# Altium PCB PCIe_x1_LP_template.PcbDoc
Units mm, origin at the board's own origin, x right, y up, seen from the top; angles counter-clockwise.
Board outline 92.5 x 68.9 mm, 6 copper layers (SIG1, GND1, PWR1, SIG2, GND2, SIG3), stack 1.546 mm thick; 11 components, 310 nets, 86 pads, 0 vias.
Unrouted connection lines stored in the file: 22.
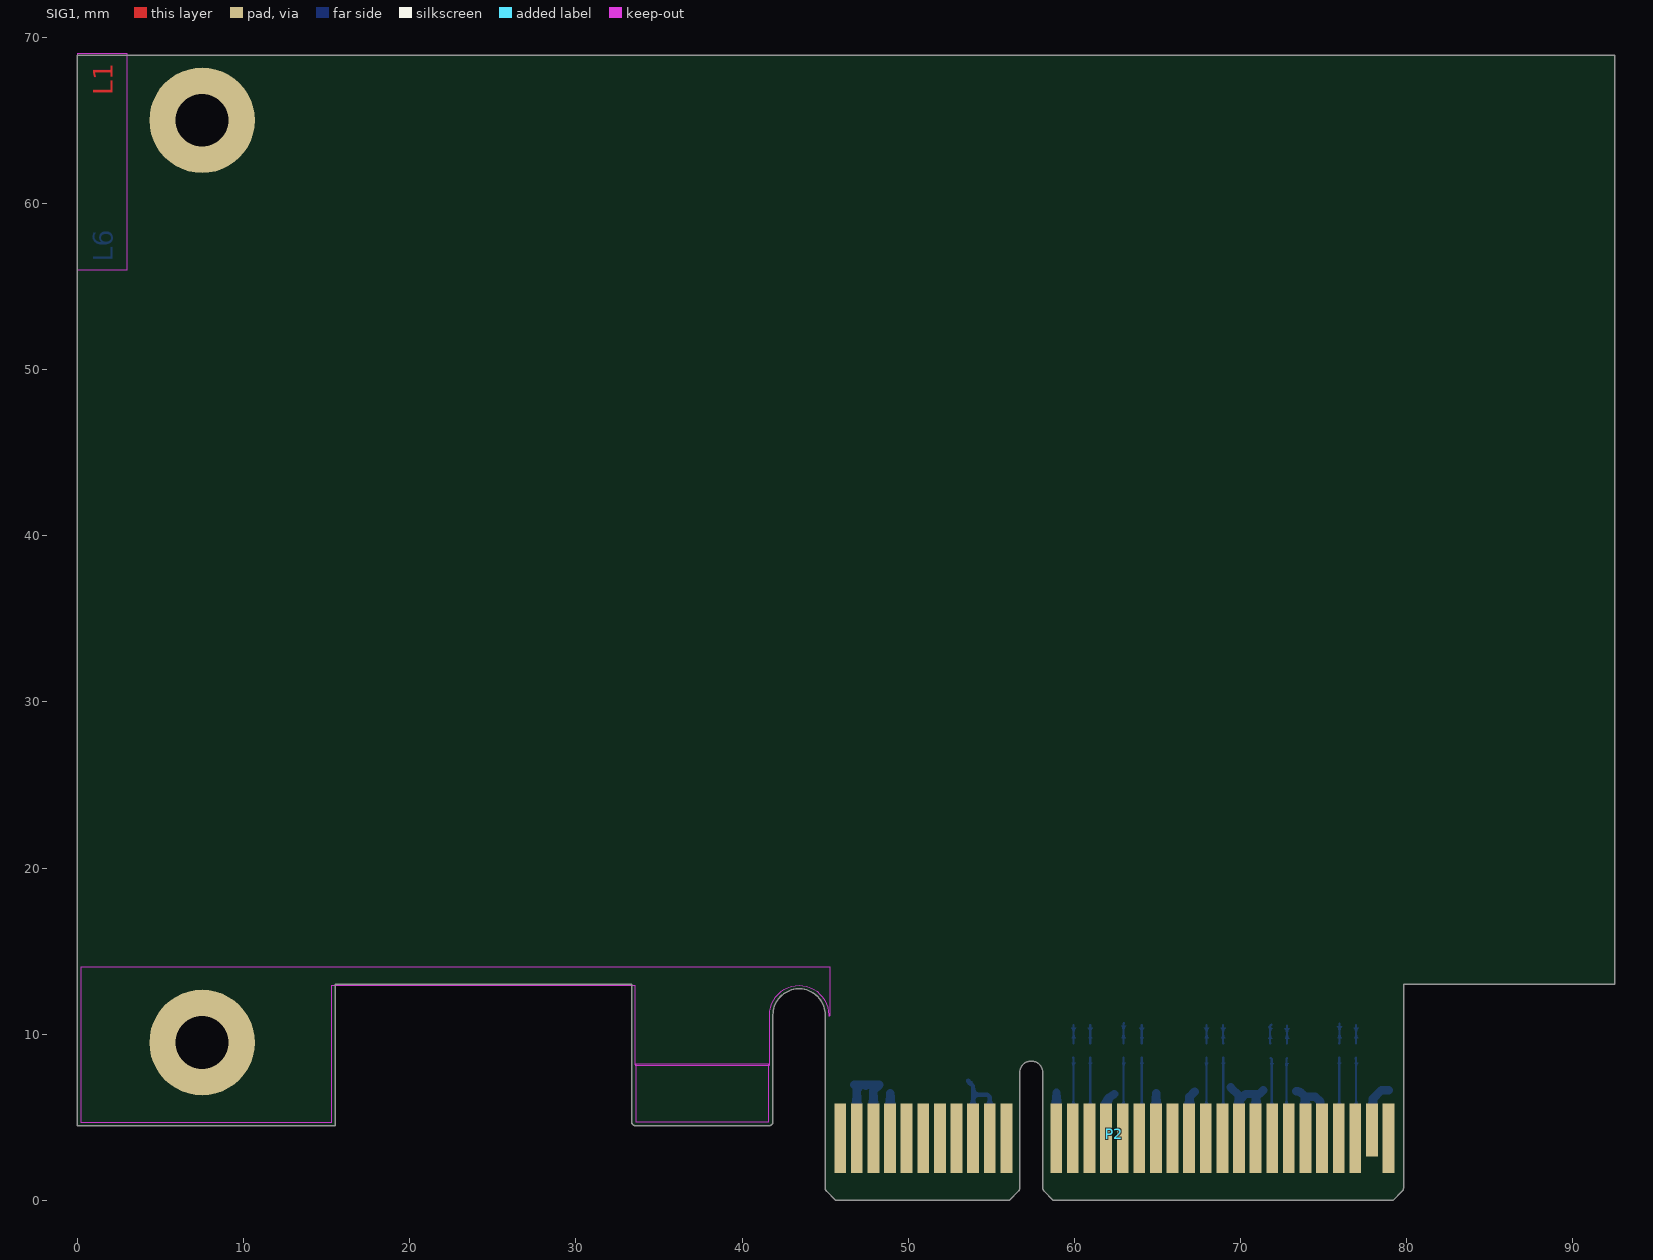
[diagram p0: SIG1 view]
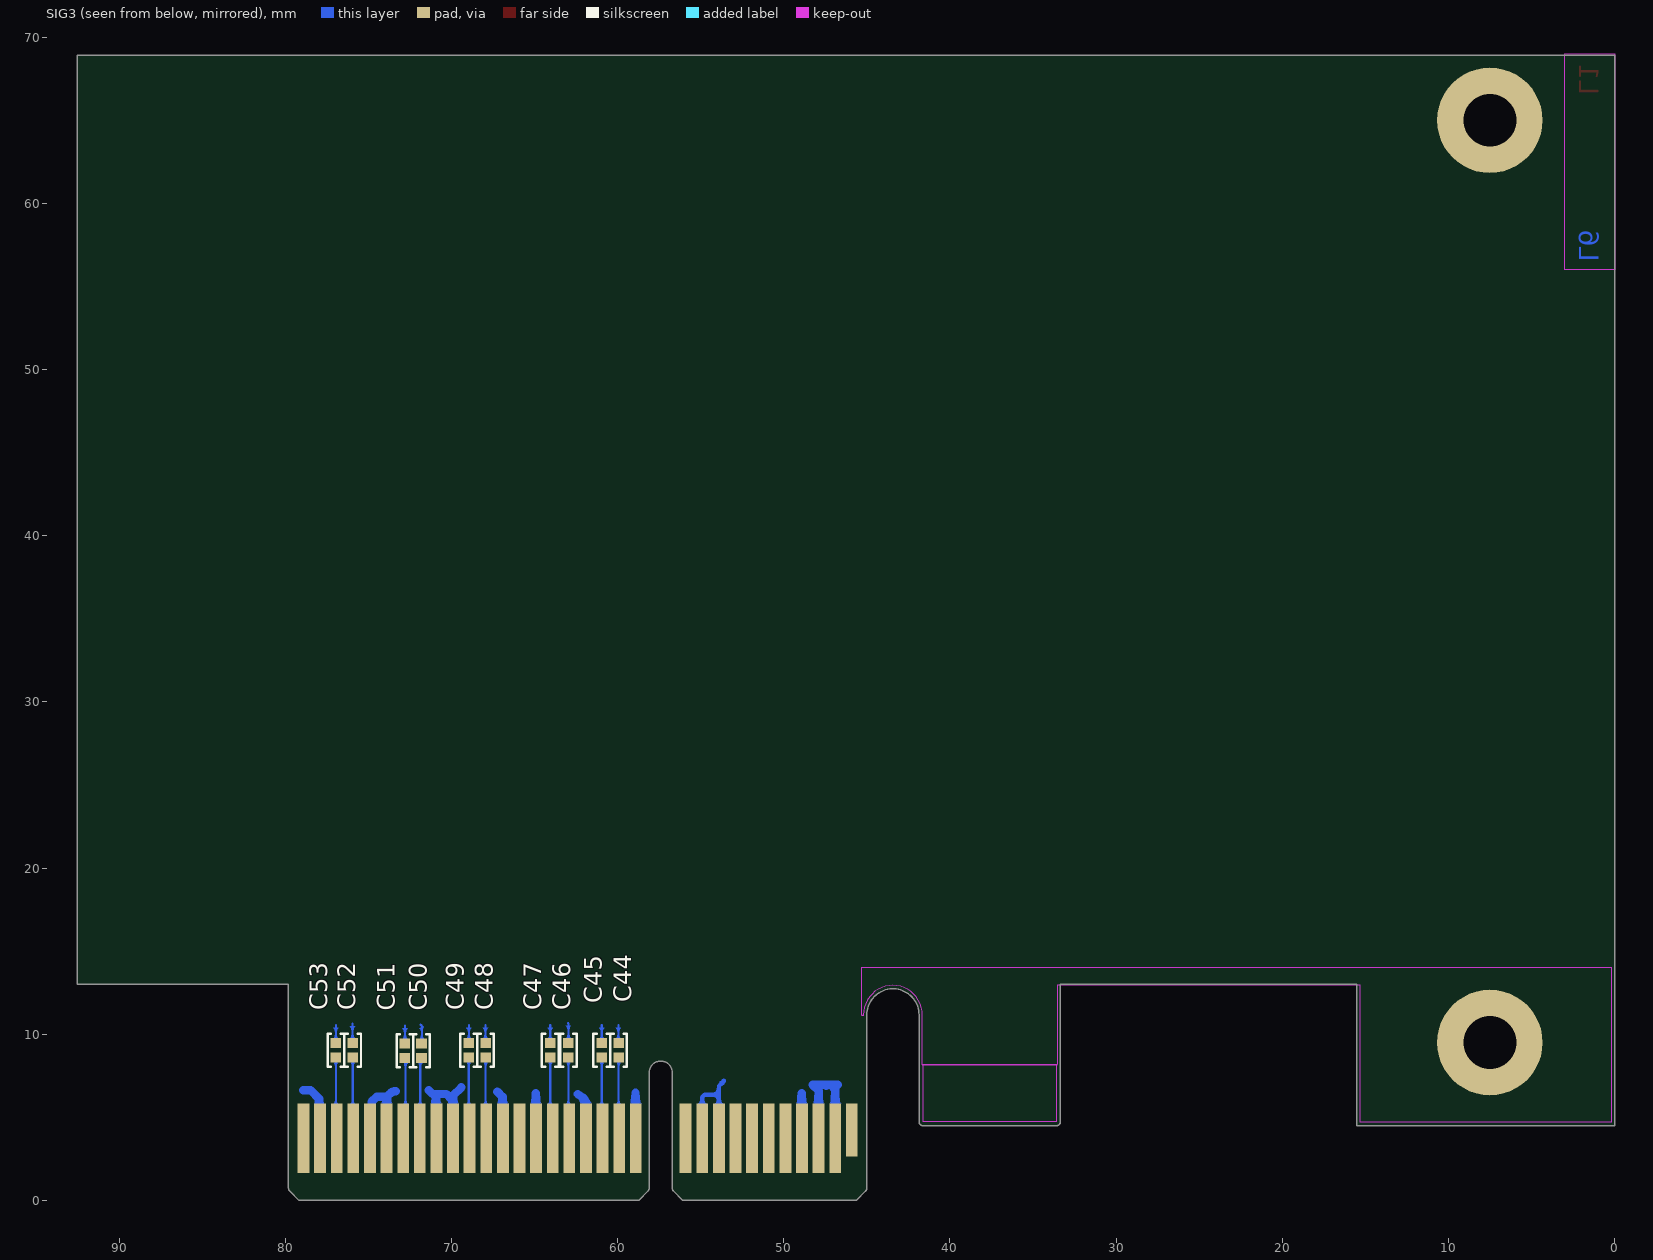
[diagram p1: SIG3 view, seen from below]
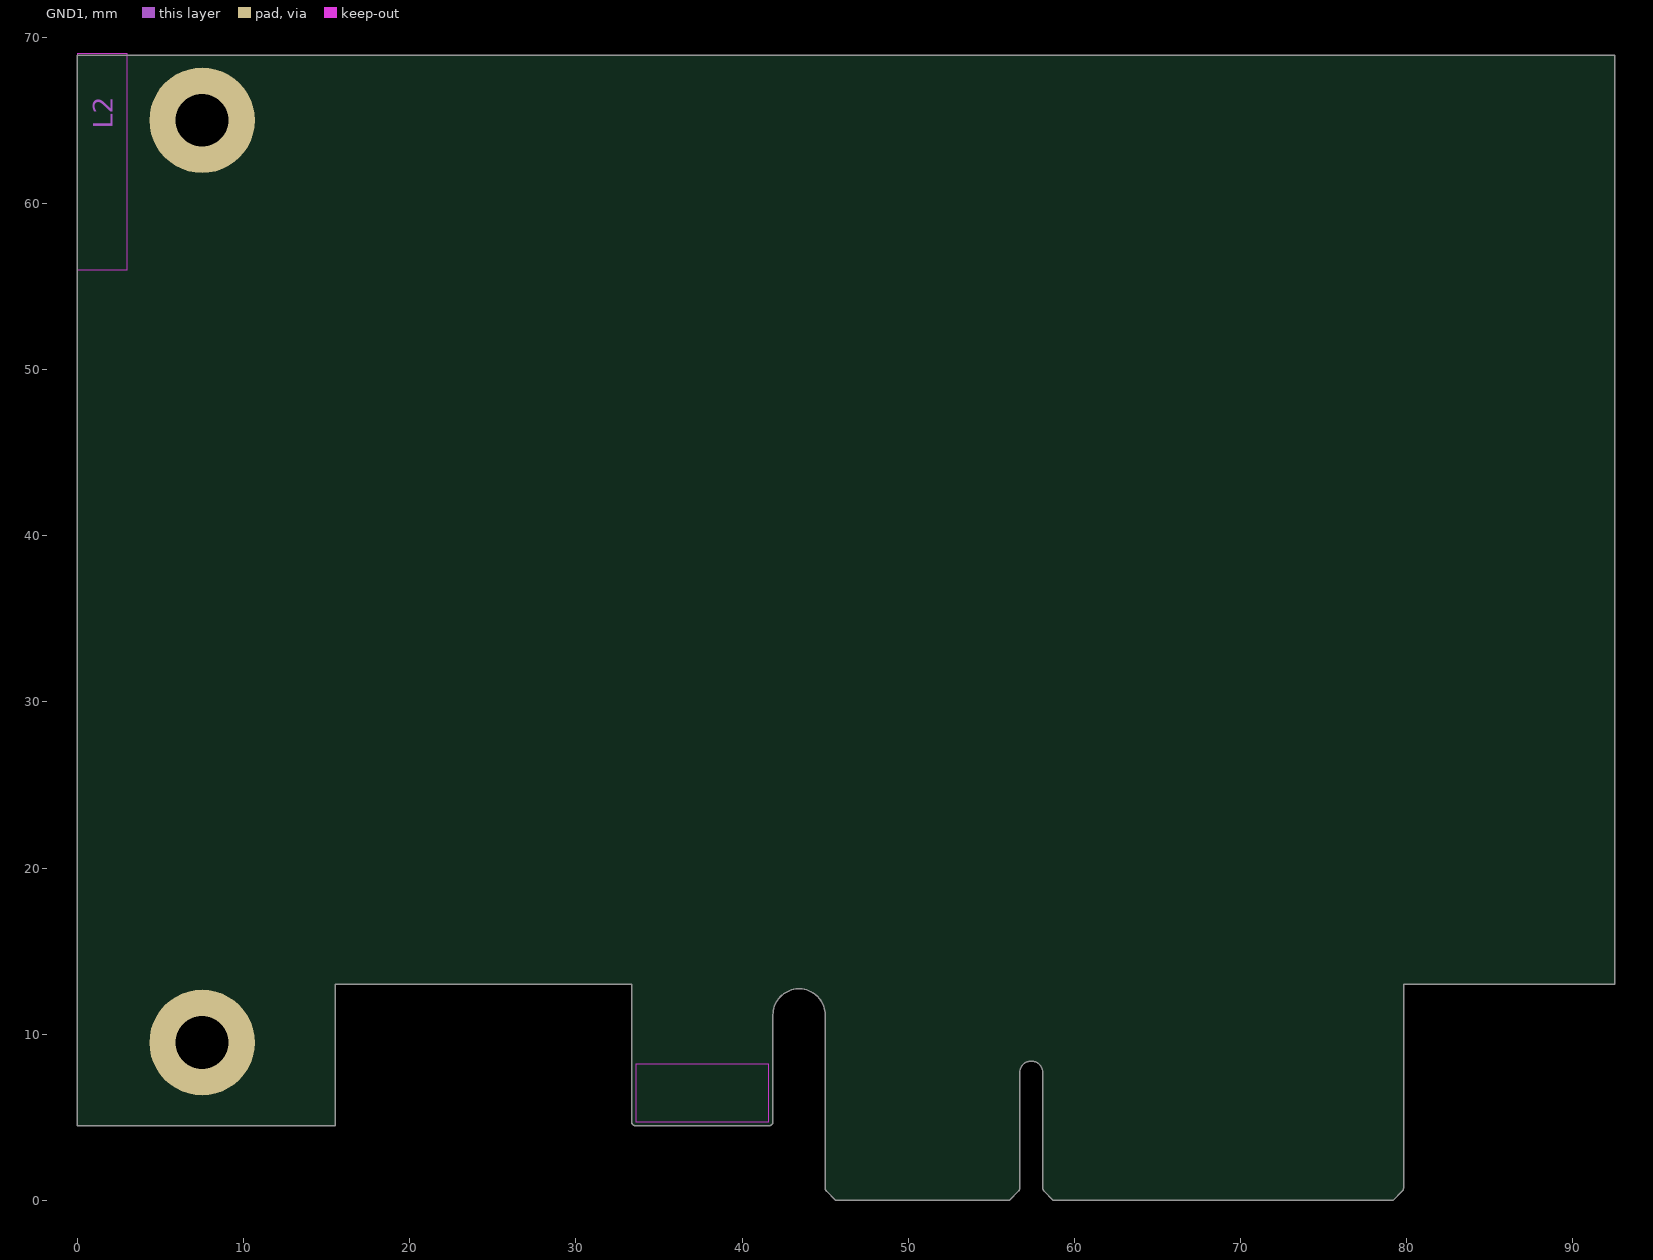
[diagram p2: GND1]
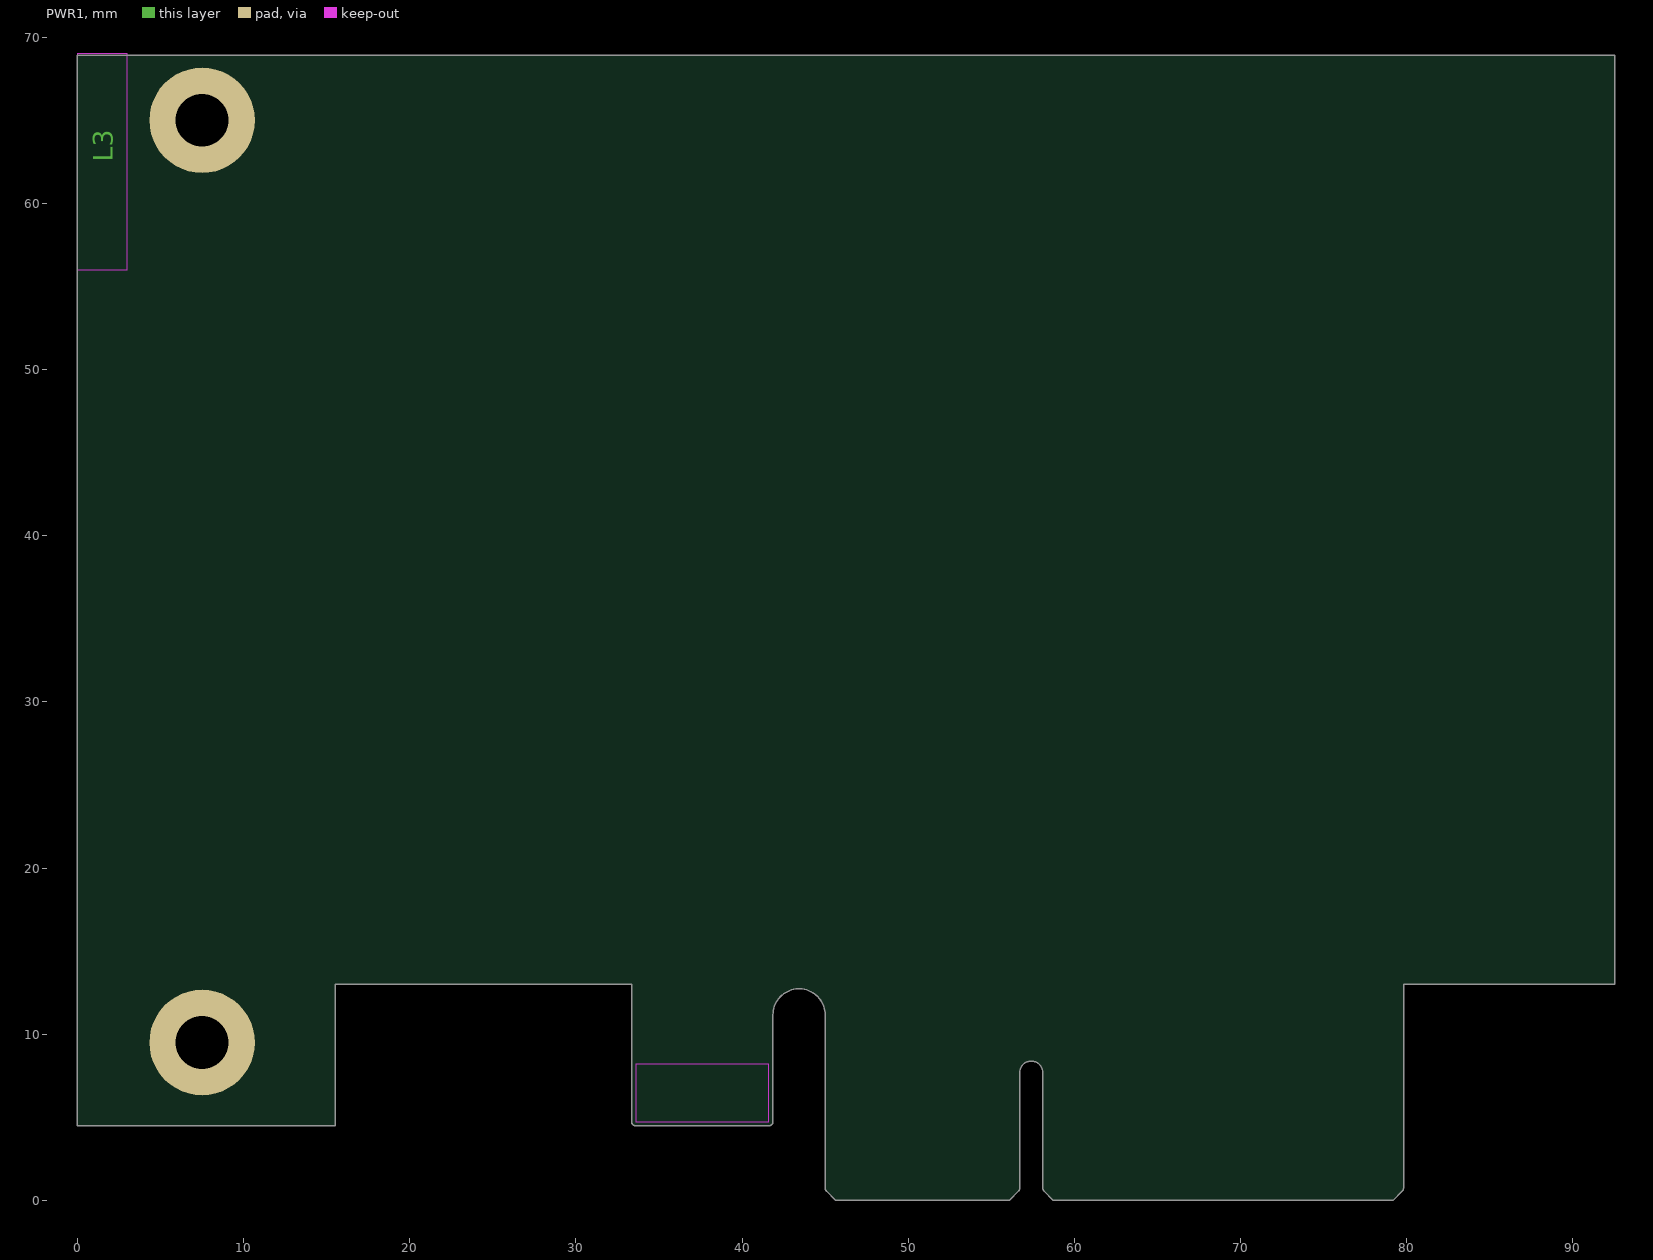
[diagram p3: PWR1]
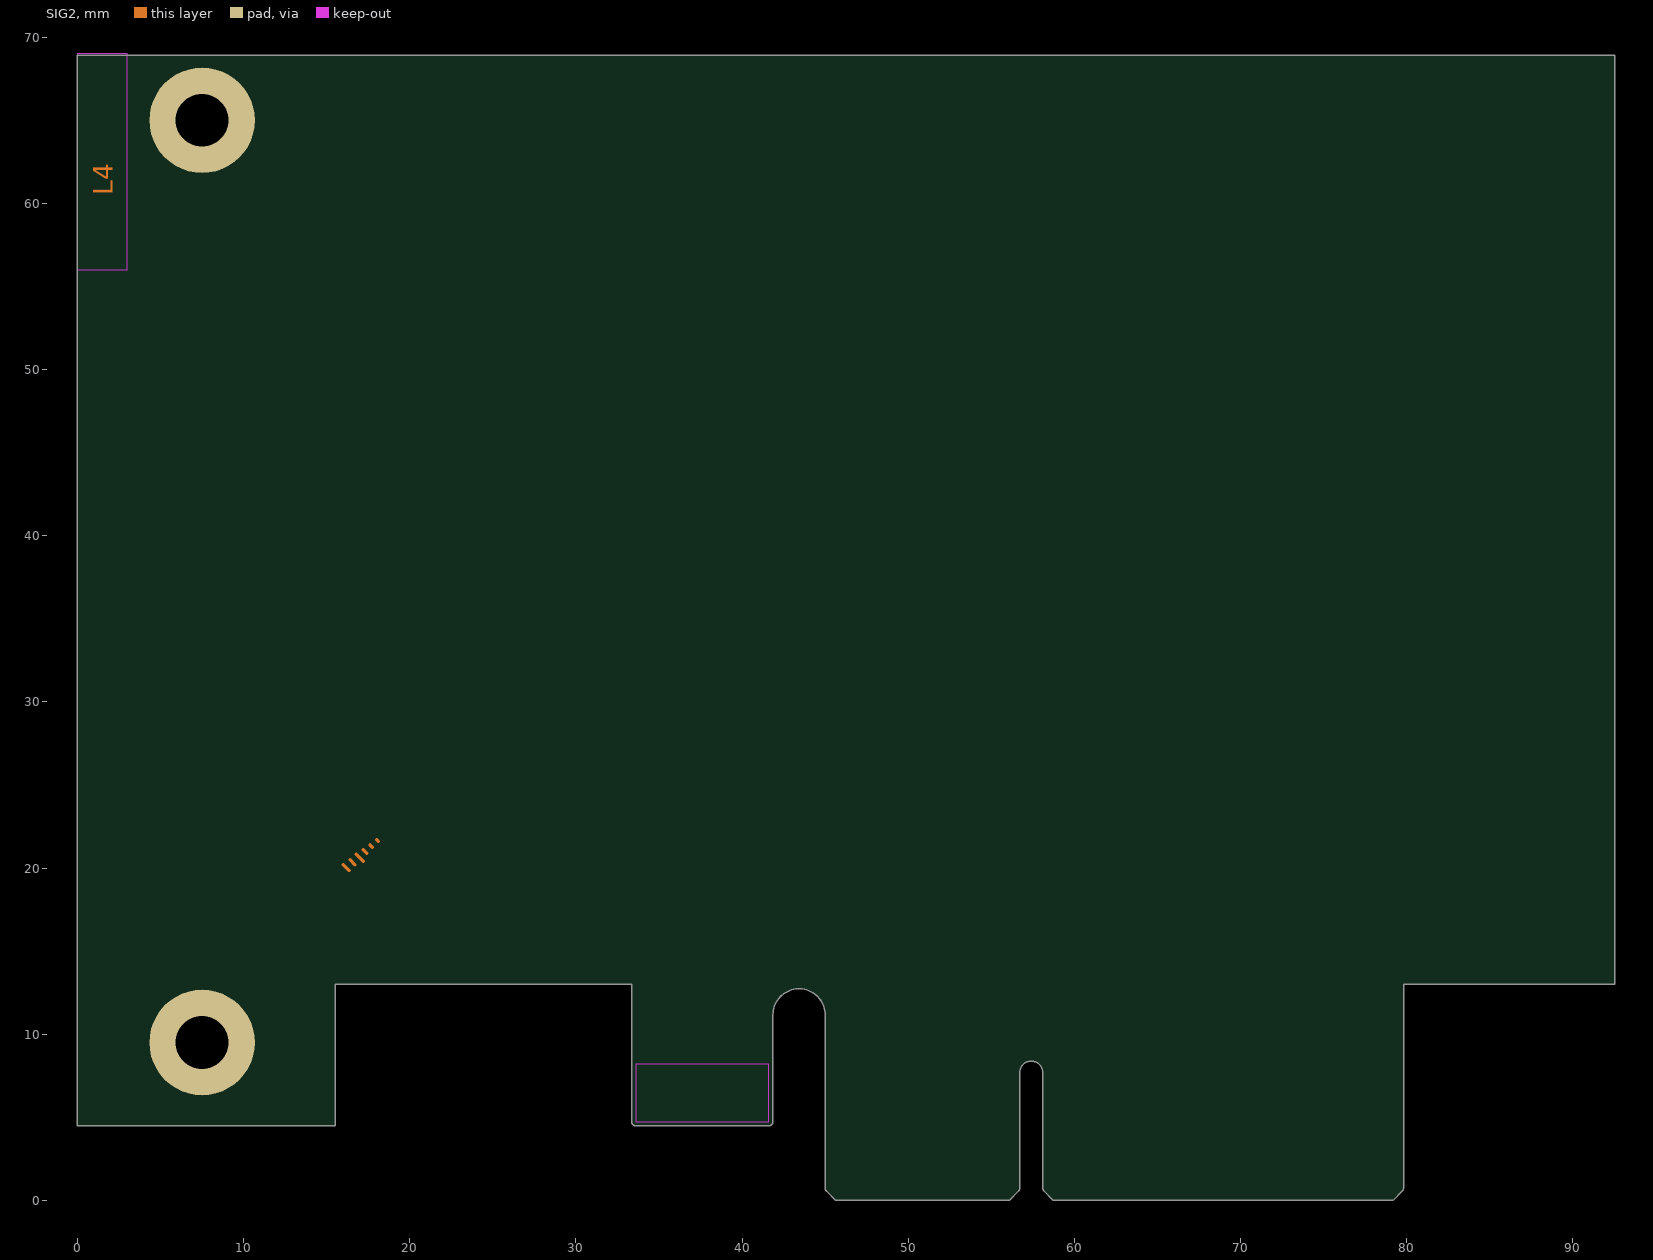
[diagram p4: SIG2]
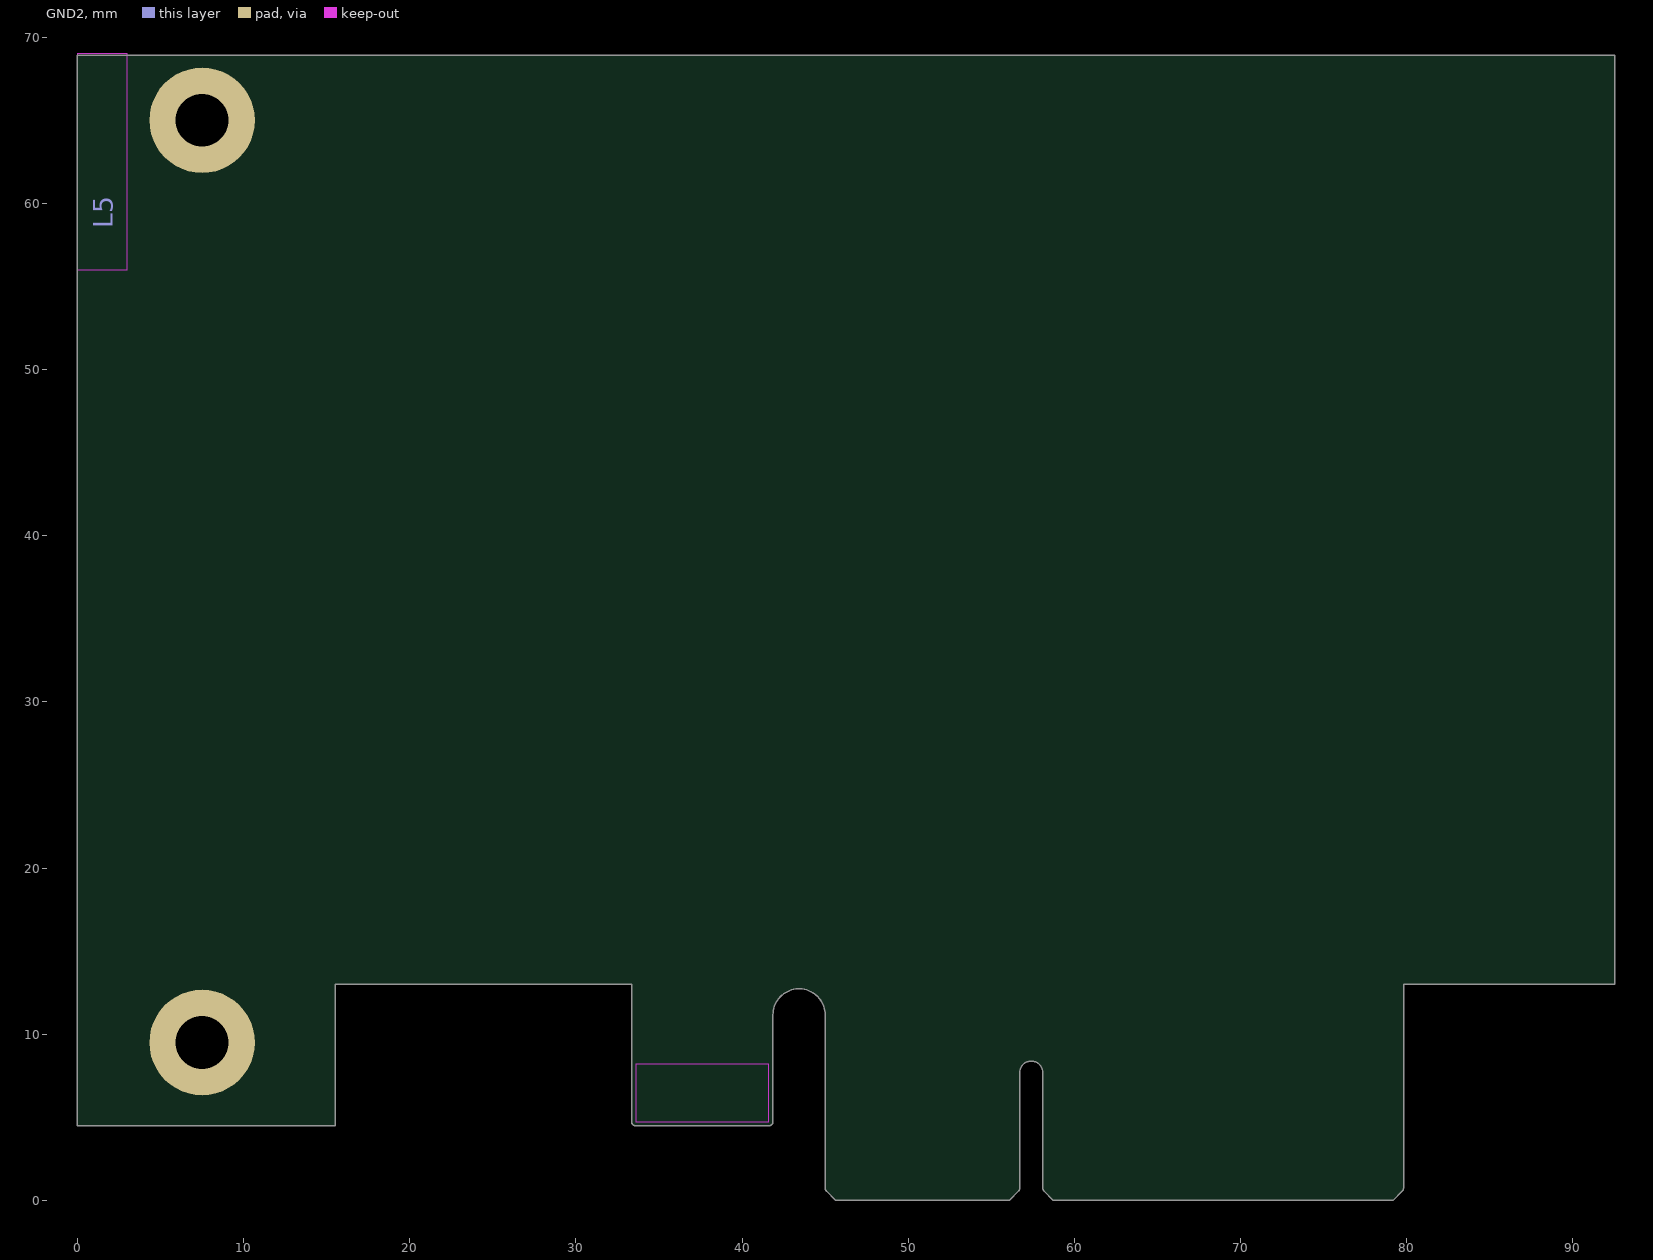
[diagram p5: GND2]
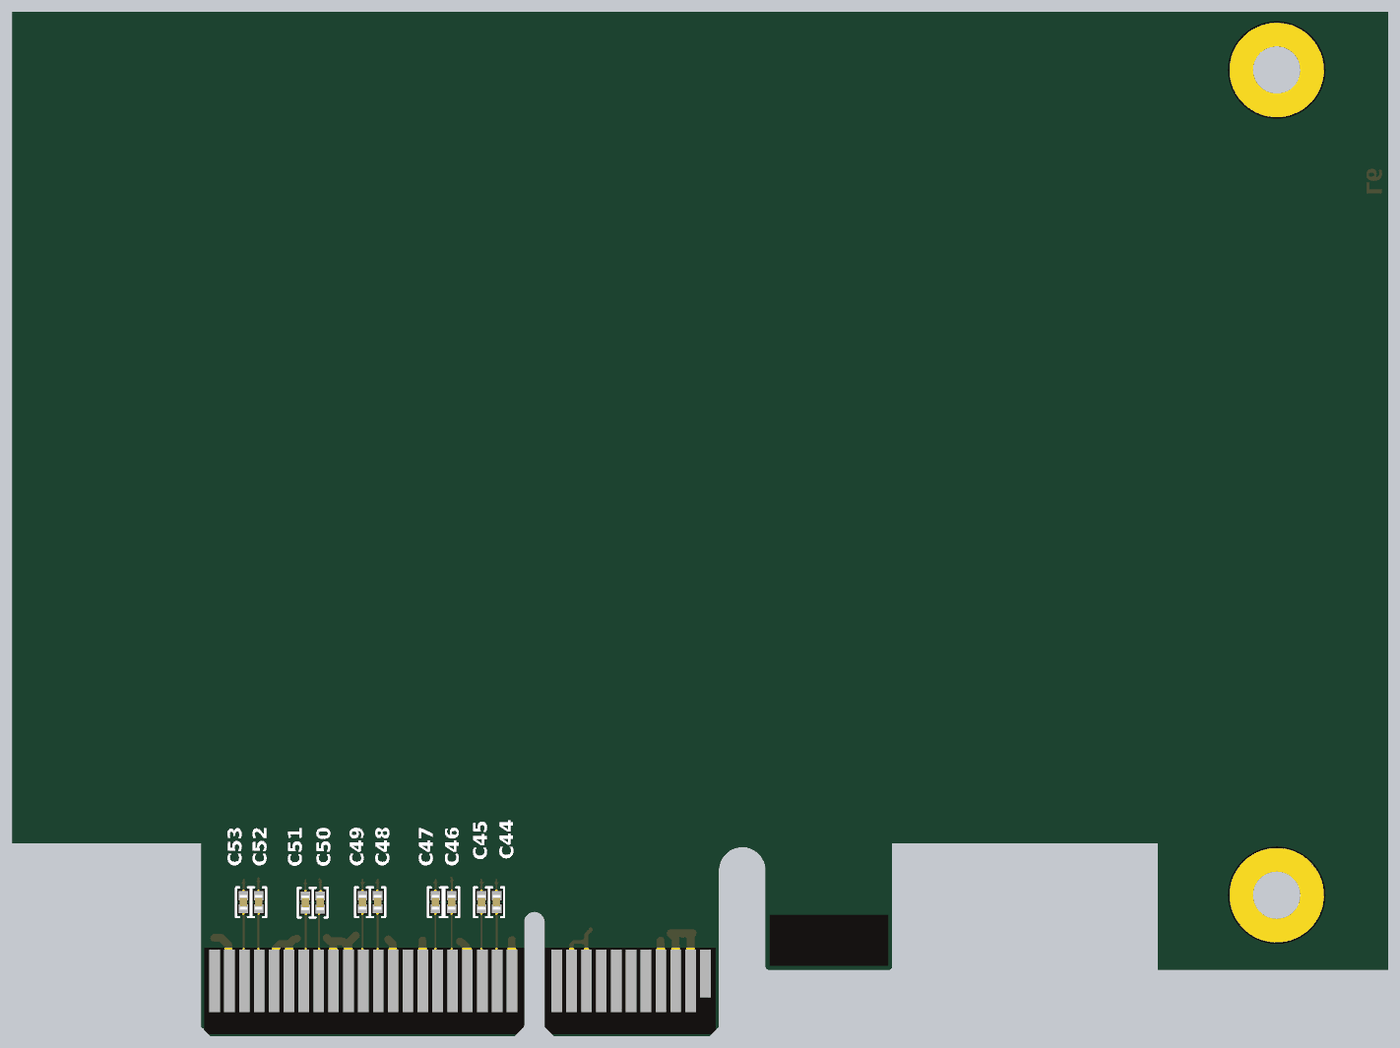
[diagram p6: 3D render of the assembled board from below, using the file's embedded part models]

## Layer stack, top to bottom
Top Mask: solder mask 0.015, Solder Resist, Dk 3.8
SIG1: signal copper 0.035
Dielectric 1: prepreg 0.13, 2116, Dk 4.45
GND1: signal copper 0.035
Core 1: core 0.44, FR4 Tg150, Dk 4.6
PWR1: signal copper 0.035
Dielectric 2: prepreg 0.196, 7628, Dk 4.5
SIG2: signal copper 0.035
Core 2: core 0.44, FR4 Tg150, Dk 4.6
GND2: signal copper 0.035
Dielectric 3: prepreg 0.13, 2116, Dk 4.45
SIG3: signal copper 0.035
Bottom Mask: solder mask 0.015, Solder Resist, Dk 3.8

## Board outline
0,4.5 15.5,4.5 15.5,13 33.346,13 33.346,4.738 ccw(c33.6,4.738) 33.6,4.483 41.6,4.483 ccw(c41.6,4.738) 41.854,4.738 41.854,11.163 cw(c43.425,11.163) 44.996,11.163 44.996,11.161 44.996,0.738 ccw(c45.25,0.738) 45.07,0.558 45.628,0 56.072,0 56.63,0.558 ccw(c56.45,0.738) 56.704,0.738 56.704,7.688 cw(c57.4,7.688) 58.096,7.688 58.096,0.738 ccw(c58.35,0.738) 58.17,0.558 58.728,0 79.172,0 79.73,0.558 ccw(c79.55,0.738) 79.804,0.738 79.804,13 92.5,13 92.5,68.9 0,68.9

## Design rules (kind name [scope] priority, off if disabled: settings)
BoardOutlineClearance [All] p1: gap=0.305 ignorepadtopadclearanceinfootprint=FALSE
Clearance Clearance_50ohm [InNetClass('S50')] p1 off: gap=0.127 ignorepadtopadclearanceinfootprint=TRUE except(0.5: Arc-Arc Arc-Track Track-Track)
Clearance Clearance_Polygon [InPolygon] p2: gap=0.2 ignorepadtopadclearanceinfootprint=TRUE
Clearance Clearance_PCIE [InDifferentialPairClass('PCIE')] p3: gap=0.127 ignorepadtopadclearanceinfootprint=FALSE
Clearance [All] p4: gap=0.127 ignorepadtopadclearanceinfootprint=TRUE
ComponentClearance [All] p1: gap=0.254 collisioncheckmode=3 verticalgap=0.051 showdistances=FALSE
DiffPairsRouting [InDifferentialPairClass('USB')] p1: maxlimit=2 minlimit=0.127 mostfreqgap=0.152 toplayer_mingap=0.211 toplayer_maxgap=0.211 toplayer_prefgap=0.211 toplayer_minwidth=0.2 toplayer_maxwidth=0.2 toplayer_prefwidth=0.2 bottomlayer_mingap=0.211 bottomlayer_maxgap=0.211 bottomlayer_prefgap=0.211 bottomlayer_minwidth=0.2 bottomlayer_maxwidth=0.2 bottomlayer_prefwidth=0.2 impedanceprofiledriven=TRUE impedanceprofileid={C416CCDB-AAEB-4318-B8BD-C091AF4BF2BC} impedanceprofilevalue=90.000000 maxuncoupledlength=0.152
HoleSize [All] p1: absolutevalues=TRUE maxlimit=25.4 minlimit=0.2 maxpercent=80.000 minpercent=20.000
MatchedLengths MatchedLengths_2 [InDifferentialPairClass('All Differential Pairs')] p1: tolerance=0.152 checknetsindiffpair=TRUE checkdiffpairvsdiffpair=FALSE checkxsignals=FALSE checkothers=FALSE
MinimumSolderMaskSliver [All] p1 off: minsoldermaskwidth=0.025
PolygonConnect ATX_12V [IsNamedPolygon('ATX_12V')] p1: connectstyle=Relief reliefconductorwidth=0.762 reliefentries=4 polygonreliefangle="90 Angle" airgapwidth=0.203
PolygonConnect SMA_GND_1 [IsNamedPolygon('sma_gnd')] p2: connectstyle=Relief reliefconductorwidth=0.254 reliefentries=4 polygonreliefangle="90 Angle" airgapwidth=0.254
PolygonConnect [All] p3: thpad.connectstyle=Relief thpad.reliefconductorwidth=0.5 thpad.reliefentries=4 thpad.polygonreliefangle="90 Angle" thpad.airgapwidth=0.3 smdpad.connectstyle=Relief smdpad.reliefconductorwidth=0.3 smdpad.reliefentries=4 smdpad.polygonreliefangle="90 Angle" smdpad.airgapwidth=0.2 via.connectstyle=Direct via.reliefconductorwidth=0.254 via.reliefentries=4 via.polygonreliefangle="90 Angle" via.airgapwidth=0.203
RoutingVias [All] p1: holewidth=0.3 width=0.7 viastyle="Through Hole" minholewidth=0.2 minwidth=0.45 maxholewidth=0.711 maxwidth=1.27
SilkToSolderMaskClearance [IsPad] p1 off: minsilkscreentomaskgap=0.254 clearancetoexposedcopper=TRUE
SolderMaskExpansion [All] p1: expansion=0.102 istentingtop=FALSE
Width Width_50 [InNetClass('S50')] p1: maxlimit=2.032 minlimit=0.191 preferedwidth=0.203 toplayer_minwidth=0.206 toplayer_maxwidth=0.208 toplayer_prefwidth=0.207 midlayer2_maxwidth=0.193 midlayer2_prefwidth=0.192 midlayer3_maxwidth=0.193 midlayer3_prefwidth=0.192 bottomlayer_minwidth=0.206 bottomlayer_maxwidth=0.208 bottomlayer_prefwidth=0.207 impedanceprofiledriven=TRUE impedanceprofileid={C4BF263F-1A3B-48A8-BDCC-D03121EA9AAD} impedanceprofilevalue=50.000000 minimp=50.000000 maximp=50.000000 favimp=50.000000
Width [All] p2: maxlimit=2.032 minlimit=0.076 preferedwidth=0.203
25 further rules are at their usual default settings.

## Classes and differential pairs
differential pair class USB: MAC_USB
net class ANT_CTRL: ANT1_IO_IN ANT1_IO_OUT ANT2_IO_IN ANT2_IO_OUT ANT3_IO_IN ANT3_IO_OUT ANT4_IO_IN ANT4_IO_OUT
net class S50: ANT1_IN ANT1_OUT ANT2_IN ANT2_OUT ANT3_IN ANT3_OUT ANT4_IN ANT4_OUT MAC_RF_OUT NetAN3_1 NetAN4_1
differential pair MAC_USB: +MAC_USB_P -MAC_USB_N
differential pair FTDI_USB: +FTDI_USB_P -FTDI_USB_N
differential pair FTDI_USB_R: +FTDI_USB_R_P -FTDI_USB_R_N
differential pair PCIE_TX3: +PCIE_TX3_P -PCIE_TX3_N
differential pair PCIE_TX2: +PCIE_TX2_P -PCIE_TX2_N
differential pair PCIE_TX1: +PCIE_TX1_P -PCIE_TX1_N
differential pair PCIE_TX0: +PCIE_TX0_P -PCIE_TX0_N
differential pair PCIE_RX3: +PCIE_RX3_P -PCIE_RX3_N
differential pair PCIE_RX2: +PCIE_RX2_P -PCIE_RX2_N
differential pair PCIE_RX1: +PCIE_RX1_P -PCIE_RX1_N
differential pair PCIE_RX0: +PCIE_RX0_P -PCIE_RX0_N
differential pair PCIE_CLK: +PCIE_CLK_P -PCIE_CLK_N

## Components (designator, comment, footprint, x,y, rotation, side; value= is the part's Value field where it differs from the comment)
C44 "0.1 µF" "CAP 0402_1005" 59.936,9.028 r90 bottom
C45 "0.1 µF" "CAP 0402_1005" 60.952,9.028 r90 bottom
C46 "0.1 µF" "CAP 0402_1005" 62.959,9.028 r90 bottom
C47 "0.1 µF" "CAP 0402_1005" 64.051,9.028 r90 bottom
C48 "0.1 µF" "CAP 0402_1005" 67.937,9.028 r90 bottom
C49 "0.1 µF" "CAP 0402_1005" 68.953,9.028 r90 bottom
C50 "0.1 µF" "CAP 0402_1005" 71.8,9 r90 bottom
C51 "0.1 µF" "CAP 0402_1005" 72.8,9 r90 bottom
C52 "0.1 µF" "CAP 0402_1005" 75.938,9.028 r90 bottom
C53 "0.1 µF" "CAP 0402_1005" 76.954,9.028 r90 bottom
P2 "PCIex4" PCIE_4LANE_EDGE 62.4,6.461 r0 top

## Footprints (in the part's own frame and the unit in brackets; to place one, negate y for a bottom-side part, rotate by r counter-clockwise, add the part's x,y. Pads: shape width x height; smd on the part's side, far side on the other; paste and mask are expansions set on the pad)
"CAP 0402_1005" [mm] "Chip Capacitor, 2-Leads, Body 1.02x0.51mm, IPC Medium Density"
  rect 0.6x0.64 smd: 1(-0.44,0) 2(0.44,0)
  silkscreen extent -1,-0.5 1,0.5, body extent -0.5,-0.26 0.5,0.26, height 0.52
PCIE_4LANE_EDGE [mil] "PCIE_4LANE_EDGE"
  rect 28x126 smd far side: A1(-649.6,-87.74)
  rect 28x165 smd far side: A2(-610.23,-107.24) A3(-570.86,-107.24) A4(-531.49,-107.24) A5(-492.12,-107.24) A6(-452.75,-107.24) A7(-413.38,-107.24) A8(-374.01,-107.24) A9(-334.64,-107.24) A10(-295.27,-107.24) A11(-255.9,-107.24) A12(-137.79,-107.24) A13(-98.42,-107.24) A14(-59.05,-107.24) A15(-19.68,-107.24) A16(19.69,-107.24) A17(59.06,-107.24) A18(98.43,-107.24) A19(137.8,-107.24) A20(177.17,-107.24) A21(216.54,-107.24) A22(255.91,-107.24) A23(295.28,-107.24) A24(334.65,-107.24) A25(374.02,-107.24) A26(413.39,-107.24) A27(452.76,-107.24) A28(492.13,-107.24) A29(531.5,-107.24) A30(570.87,-107.24) A31(610.24,-107.24) A32(649.61,-107.24)
  rect 28x165 smd: B1(-649.6,-107.24) B2(-610.23,-107.24) B3(-570.86,-107.24) B4(-531.49,-107.24) B5(-492.12,-107.24) B6(-452.75,-107.24) B7(-413.38,-107.24) B8(-374.01,-107.24) B9(-334.64,-107.24) B10(-295.27,-107.24) B11(-255.9,-107.24) B12(-137.79,-107.24) B13(-98.42,-107.24) B14(-59.05,-107.24) B15(-19.68,-107.24) B16(19.69,-107.24) B17(59.06,-107.24) B18(98.43,-107.24) B19(137.8,-107.24) B20(177.17,-107.24) B21(216.54,-107.24) B22(255.91,-107.24) B23(295.28,-107.24) B24(334.65,-107.24) B25(374.02,-107.24) B26(413.39,-107.24) B27(452.76,-107.24) B28(492.13,-107.24) B29(531.5,-107.24) B30(570.87,-107.24) B32(649.61,-107.24)
  rect 28x126 smd: B31(610.24,-87.74)

## Part data
C44 C45 C46 C47 C48 C49 C50 C51 C52 C53: library part CC0402KRX7R9BB104, "CAP CER 0.1UF 50V X7R 0402", Device Package="0402 (1005 Metric)", Manufacturer=Yageo, Operating Temperature="-55°C ~ 125°C", Supplier Part Number 1=311-3566-1-ND, Temperature Coefficient=X7R, Tolerance=±10%, Voltage - Rated=50V, Applications="General Purpose", Capacitance="0.1 µF", componentlink1description=Datasheet, componentlink1url=https://www.yageo.com/upload/media/product/productsearch/datasheet/mlcc/UPY-GPHC_X7R_6.3V-to-50V_18.pdf, componentlink2description="DigiKey Link", componentlink2url=https://www.digikey.com/en/products/detail/yageo/CC0402KRX7R9BB104/5883371, LastUpdated="09.02.2024 20:04:27", Lifecycle Status=Active, Minimum Order=10, Mounting Type="Surface Mount, MLCC", Package / Case="0402 (1005 Metric)", packaging=TapeAndReel, Part Number=CC0402KRX7R9BB104, Part Status=Active, partid=8451, Price=0.01, series=CC, Size / Dimension="0.039\" L x 0.020\" W (1.00mm x 0.50mm)", Supplier 1=DigiKey, Thickness (Max)="0.022\" (0.55mm)"
P2: "PCIE x4 Edge Connector,OrCAD Symbol,NC", Manufacturer=NA, Part Number=451, NOTE=NC, Part Type=SMT, Vendor P/N=NA

## Free pads (board coordinates)
  round 6.35 hole 3.18 unplated: MH1(7.5,9.5) MH2(7.5,65)

## Nets (pads, with @x,y where several pads share a name; then routed paths per layer and width w, separated by ;. In a path a pad name is that pad's centre, name@x,y a point inside that pad or via, vN(x,y) a via of type N, cw(c..) or ccw(c..) an arc to the next point about the centre after c; other vN are vias at no path point)
+3.3V: 
+3.3V_PCIE: P2.A9 P2.A10 P2.B8 | length 7.1
  SIG3 w0.254: 53.61,7.21 53.61,7.168 53.9,6.878 53.9,6.361 ; P2.A9 53.9,6.361 ; P2.A10 54.9,6.212 54.751,6.361 53.9,6.361
+5.0V: 
+12V: 
+12V_PCIE: P2.A2 P2.A3 P2.B1 P2.B2 P2.B3 | length 9.6
  SIG3 w0.508: 46.75,6.95 47.162,6.95 ; P2.A2@46.92,3.059 46.9,3.079 46.9,6.688 47.162,6.95 ; 47.381,6.95 47.447,6.884 ; P2.A3@47.92,3.059 47.9,3.079 47.9,6.6 48.25,6.95 47.162,6.95
+12V_SENS: 
ANADC_I2C_SCL: 
ANADC_I2C_SDA: 
ANT1_IN: 
ANT1_IO_IN: 
ANT1_IO_OUT: 
ANT1_OUT: 
ANT2_IN: 
ANT2_IO_IN:  | length 0.1
  SIG2 w0.203: 18,21.7 18.1,21.6
ANT2_IO_OUT:  | length 0.2
  SIG2 w0.203: 17.6,21.4 17.75,21.25
ANT2_OUT: 
ANT3_IN: 
ANT3_IO_IN:  | length 0.6
  SIG2 w0.203: 16.776,20.824 17.05,20.55 17.2,20.4
ANT3_IO_OUT:  | length 0.3
  SIG2 w0.203: 17.2,21.1 17.4,20.9
ANT3_OUT: 
ANT4_IN: 
ANT4_IO_IN:  | length 0.5
  SIG2 w0.203: 16,20.2 16.35,19.85
ANT4_IO_OUT:  | length 0.4
  SIG2 w0.2: 16.4,20.5 16.7,20.2
ANT4_OUT: 
BNO_BLIND: 
BNO_INT: 
BNO_P3V3: 
BNO_XIN32: 
BNO_XOUT32: 
DC_I2C_SCL: 
DC_I2C_SDA: 
DIP_SW_GPS1_SEL: 
DIP_SW_GPS2_SEL: 
DIP_SW_MACSER_SEL: 
DIP_SW_PPS_SEL: 
DIP_SW_UART_SEL: 
EXT_EEPROM_WP: 
EXT_GPIO_1: 
EXT_GPIO_2: 
EXT_GPIO_3: 
EXT_GPIO_4: 
EXT_GPIO_7: 
EXT_GPIO_8: 
EXT_GPIO_9: 
EXT_GPIO_10: 
FPGA_BNO_XIN32: 
FPGA_BNO_XOUT32: 
FPGA_MAC_PPS_DIFF_IN0: 
FPGA_MAC_PPS_IN0-: 
FPGA_MAC_PPS_IN1-: 
FPGA_MAC_PPS_OUT-: 
FPGA_MAC_PPSDIFF_OUT: 
FPGA_MAC_UART_TX: 
FPGA_TCK: 
FPGA_TDI: 
FPGA_TDO: 
FPGA_TMS: 
FTDI_P3V3: 
FTDI_RX: 
FTDI_TX: 
FTDI_USB_N: 
FTDI_USB_P: 
FTDI_USB_R_N: 
FTDI_USB_R_P: 
FTDI_VBUS: 
GND: P2.A4 P2.A12 P2.A15 P2.A18 P2.A20 P2.A23 P2.A24 P2.A27 P2.A28 P2.A31 P2.B4 P2.B7 P2.B13 P2.B16 P2.B18 P2.B21 P2.B22 P2.B25 P2.B26 P2.B29 P2.B32 | length 35.7
  SIG3 w0.508: P2.A4@48.92,3.059 48.92,6.455 ; P2.A12@58.92,3.059 58.92,6.488 ; P2.A15@61.92,3.059 61.92,5.797 cw(c62.428,5.797) 62.139,6.215 62.405,6.399 ; P2.A18@64.92,3.059 64.92,6.457 ; P2.A20@66.92,3.059 66.92,6.228 67.227,6.534 ; 69.4,6.8 69.9,6.3 P2.A23 ; 69.986,6.086 70.299,6.4 71.112,6.4 ; P2.A24 70.931,3.769 70.931,6.219 71.112,6.4 ; 71.37,6.638 71.132,6.4 71.112,6.4 ; 73.359,6.577 cw(c73.324,6.071) 73.682,6.43 ; 73.683,6.43 73.881,6.231 ; P2.A27 73.881,3.756 73.881,6.231 ; P2.A28 74.798,3.839 74.798,5.934 74.501,6.231 73.881,6.231 ; P2.A31 P2.A31@77.931,3.769 ; P2.A31@77.92,3.059 77.931,3.07 P2.A31@77.931,3.769 ; 78.925,6.638 78.479,6.638 77.956,6.115 77.956,3.794 P2.A31@77.931,3.769
GNSS2_P3V3: 
GNSS2_P5V0: 
GPS1_PIN11: 
GPS1_PIN12: 
GPS1_PIN13: 
GPS1_PIN14: 
GPS1_PIN15: 
GPS1_RST: 
GPS1_RX: 
GPS1_TP1: 
GPS1_TP2: 
GPS1_TX: 
GPS2_PIN11: 
GPS2_PIN12: 
GPS2_PIN13: 
GPS2_PIN14: 
GPS2_PIN15: 
GPS2_RST: 
GPS2_RX: 
GPS2_RX_FPGA: 
GPS2_TP1: 
GPS2_TP2: 
GPS2_TX: 
GPS2_TX_FPGA: 
IO_LED1: 
IO_LED2: 
IO_LED3: 
IO_LED4: 
KEY1: 
KEY2: 
LED1: 
LED1_B: 
LED1_G: 
LED1_R: 
LED2: 
LED2_B: 
LED2_G: 
LED2_R: 
LED3: 
LED3_B: 
LED3_G: 
LED3_R: 
LED4: 
LED4_B: 
LED4_G: 
LED4_R: 
LED5_B: 
LED5_G: 
LED5_R: 
LED6_B: 
LED6_G: 
LED6_R: 
M2_GPS1_PIN11: 
M2_GPS1_PIN12: 
M2_GPS1_RX: 
M2_GPS1_TP1: 
M2_GPS1_TP2: 
M2_GPS1_TX: 
M2_GPS2_PIN11: 
M2_GPS2_PIN12: 
M2_GPS2_RX: 
M2_GPS2_TP1: 
M2_GPS2_TP2: 
M2_GPS2_TX: 
MAC_ALARM: 
MAC_BITE: 
MAC_FPGA_UART_RX: 
MAC_FREQ_CTRL: 
MAC_I2C_SCL: 
MAC_I2C_SDA: 
MAC_PPS_IN: 
MAC_PPS_IN0_N: 
MAC_PPS_IN0_P: 
MAC_PPS_IN1_N: 
MAC_PPS_IN1_P: 
MAC_PPS_OUT: 
MAC_PPS_OUT_N: 
MAC_PPS_OUT_P: 
MAC_RF_OUT: 
MAC_RX: 
MAC_TX: 
MAC_USB_N: 
MAC_USB_P: 
MAC_USB_PWR: 
MAC_VCC: 
NetAN1_1: 
NetAN2_1: 
NetAN3_1: 
NetAN4_1: 
NetC44_1: C44.1 P2.A13 | length 4.9
  SIG3 w0.127: P2.A13 ccw(c59.813,3.825) 59.936,3.825 59.936,8.598 ccw(c59.975,8.559) C44.1@59.92,8.559
  SIG3 w0.203: P2.A13@59.92,3.059 P2.A13@59.936,3.075
NetC45_1: C45.1 P2.A14 | length 4.9
  SIG3 w0.127: P2.A14 ccw(c60.774,3.863) 60.952,3.863 C45.1@60.952,8.598
NetC46_1: C46.1 P2.A16 | length 5
  SIG3 w0.127: P2.A16 ccw(c62.759,3.879) 62.959,3.879 C46.1@62.959,8.598 ; P2.A16@62.92,3.059 ccw(c62.827,3.152) P2.A16@62.959,3.152
NetC47_1: C47.1 P2.A17 | length 4.9
  SIG3 w0.127: P2.A17 ccw(c63.536,4.102) 64.051,4.102 C47.1@64.051,8.598
NetC48_1: C48.1 P2.A21 | length 4.9
  SIG3 w0.127: P2.A21 ccw(c67.811,3.827) 67.937,3.827 C48.1@67.937,8.598 ; P2.A21@67.92,3.059 ccw(c67.879,3.1) P2.A21@67.937,3.1
NetC49_1: C49.1 P2.A22 | length 5
  SIG3 w0.127: P2.A22 ccw(c68.772,3.866) 68.953,3.866 C49.1@68.953,8.598 ; P2.A22@68.92,3.059 ccw(c68.84,3.138) P2.A22@68.953,3.138
  SIG3 w0.203: P2.A22@68.92,3.059 P2.A22@68.953,3.092
NetC50_1: C50.1 P2.A25 | length 4.9
  SIG3 w0.127: C50.1@71.8,8.57 71.874,8.496 71.874,3.8 ccw(c71.963,3.8) P2.A25
NetC51_1: C51.1 P2.A26 | length 5.3
  SIG3 w0.127: P2.A26@72.763,3.438 ccw(c73.299,3.438) P2.A26@72.919,3.059 ; C51.1@72.8,8.57 72.763,8.533 72.763,4.068 ccw(c73.231,4.068) P2.A26
NetC52_1: C52.1 P2.A29 | length 5
  SIG3 w0.127: P2.A29 ccw(c75.808,3.829) 75.938,3.829 75.938,8.598 ccw(c75.982,8.554) C52.1@75.92,8.554 ; P2.A29@75.92,3.059 ccw(c75.876,3.102) P2.A29@75.938,3.102
NetC53_1: C53.1 P2.A30 | length 5
  SIG3 w0.127: P2.A30 ccw(c76.77,3.868) 76.954,3.868 76.954,8.598 ccw(c77.036,8.515) C53.1@76.92,8.515
  SIG3 w0.203: P2.A30@76.92,3.059 P2.A30@76.954,3.093
NetC65_2: 
NetC91_1: 
NetC92_1: 
NetCR1_1: 
NetCR1_2: 
NetD3_1: 
NetD4_1: 
NetD9_1: 
NetD10_1: 
NetD11_1: 
NetD12_1: 
NetD19_1: 
NetD20_1: 
NetD21_1: 
NetD22_1: 
NetD24_1: 
NetJ44_35: 
NetJ44_46: 
NetJ45_35: 
NetJ45_46: 
NetP1_5: 
NetP2_B17: P2.B17
NetP2_B31: P2.B31
NetP4_1: 
NetP4_3: 
NetP4_5: 
NetP4_9: 
NetR2_1: 
NetR2_2: 
NetR4_2: 
NetR5_1: 
NetR6_2: 
NetR9_2: 
NetR13_1: 
NetR25_1: 
NetR26_1: 
NetR26_2: 
NetR28_1: 
NetR33_1: 
NetR34_1: 
NetR40_2: 
NetR41_2: 
NetR42_1: 
NetR49_1: 
NetR51_2: 
NetR52_1: 
NetR53_1: 
NetR55_2: 
NetR57_2: 
NetR58_2: 
NetR61_1: 
NetR61_2: 
NetR62_1: 
NetR64_1: 
NetR65_1: 
NetR66_1: 
NetR67_2: 
NetR69_2: 
NetR70_1: 
NetR76_2: 
NetR79_1: 
NetR80_1: 
NetR84_2: 
NetR85_2: 
NetR86_2: 
NetR87_2: 
NetR90_2: 
NetR91_2: 
NetR92_2: 
NetR93_2: 
NetR94_2: 
NetR95_2: 
NetR96_2: 
NetR97_2: 
NetR98_2: 
NetR99_2: 
NetR108_2: 
NetR111_2: 
NetR121_2: 
NetR126_2: 
NetR127_2: 
NetR128_2: 
NetR129_2: 
NetR142_1: 
NetR143_1: 
NetR144_1: 
NetR145_1: 
NetR146_1: 
NetR147_1: 
NetR150_1: 
NetR152_1: 
NetR171_1: 
NetR175_1: 
NetR176_1: 
NetR177_1: 
NetR180_1: 
NetR183_2: 
P3V3_MUN_FB: 
P3V3_MUN_PHASE: 
P3V3_MUN_VCC: 
P3V3_SENSE: 
P5V_MUN_PHASE: 
P5V_MUN_VCC: 
P5V_SENSE: 
PCIE_CLK_N: C45.2 | length 1.1
  SIG3 w0.127: 60.95,10.538 60.95,9.46 C45.2@60.952,9.458
PCIE_CLK_P: C44.2 | length 1.1
  SIG3 w0.127: C44.2@59.936,9.458 ccw(c59.902,9.491) 59.95,9.491 59.95,10.538
PCIE_PERST: P2.A11 | length 0.1
  SIG3 w0.203: P2.A11@55.85,3.788 P2.A11
PCIE_RX0_N: P2.B15
PCIE_RX0_P: P2.B14
PCIE_RX1_N: P2.B20
PCIE_RX1_P: P2.B19
PCIE_RX2_N: P2.B24
PCIE_RX2_P: P2.B23
PCIE_RX3_N: P2.B28
PCIE_RX3_P: P2.B27
PCIE_TX0_N: C47.2 | length 1.1
  SIG3 w0.127: C47.2@64.05,9.458 64.05,10.538
PCIE_TX0_P: C46.2 | length 1.2
  SIG3 w0.127: C46.2@62.959,9.458 62.95,9.466 62.95,10.525 62.951,10.591 cw(c63.078,10.59) 62.983,10.675 62.985,10.676
PCIE_TX1_N: C49.2 | length 1.1
  SIG3 w0.127: 68.95,10.538 68.95,9.461 C49.2@68.953,9.458
PCIE_TX1_P: C48.2 | length 1.1
  SIG3 w0.127: C48.2@67.937,9.458 ccw(c67.906,9.489) 67.95,9.489 67.95,10.538
PCIE_TX2_N: C51.2 | length 1.1
  SIG3 w0.127: 72.787,10.51 72.787,9.461 ccw(c72.831,9.461) C51.2@72.8,9.43
PCIE_TX2_P: C50.2 | length 1.2
  SIG3 w0.127: C50.2@71.8,9.43 cw(c71.858,9.488) 71.776,9.488 71.776,10.453 cw(c71.903,10.452) 71.854,10.569
PCIE_TX3_N: C53.2 | length 1.1
  SIG3 w0.127: 76.95,10.538 76.95,9.462 C53.2@76.954,9.458
PCIE_TX3_P: C52.2 | length 1.2
  SIG3 w0.127: C52.2@75.938,9.458 ccw(c75.909,9.487) 75.95,9.487 75.95,10.6 cw(c76.077,10.6) 75.952,10.622 75.953,10.63
PRSNT: P2.A1
RCB_GPS1_PIN11: 
RCB_GPS1_PIN12: 
RCB_GPS1_RX: 
RCB_GPS1_TP1: 
RCB_GPS1_TP2: 
RCB_GPS1_TX: 
RCB_GPS2_PIN11: 
RCB_GPS2_PIN12: 
RCB_GPS2_RX: 
RCB_GPS2_TP1: 
RCB_GPS2_TP2: 
RCB_GPS2_TX: 
SCL: 
SDA: 
SENS1_I2C_SCL: 
SENS1_I2C_SDA: 
SENS_I2C_SCL: 
SENS_I2C_SDA: 
UART1_RXD: 
UART1_TXD: 
USB_VBUS: 
pads on no net: P2.A5 P2.A6 P2.A7 P2.A8 P2.A19 P2.A32 P2.B5 P2.B6 P2.B9 P2.B10 P2.B11 P2.B12 P2.B30

## Keep-outs
SIG1:
  region: 0.25,4.687 15.25,4.687 ccw(c15.25,4.738) 15.3,4.738 15.3,12.937 33.55,12.937 33.55,8.188 ccw(c33.6,8.188) 33.6,8.137 41.6,8.137 ccw(c41.6,8.188) 41.65,8.188 ccw(c41.6,8.188) 41.65,8.188 41.65,11.163 cw(c43.425,11.163) 45.2,11.163 ccw(c45.25,11.163) 45.3,11.163 45.3,13.988 ccw(c45.25,13.988) 45.25,14.038 0.25,14.038 ccw(c0.25,13.988) 0.2,13.988 0.2,4.738 ccw(c0.25,4.738)
SIG3:
  region: 0.25,4.687 15.25,4.687 ccw(c15.25,4.738) 15.3,4.738 15.3,12.937 33.55,12.937 33.55,8.188 ccw(c33.6,8.188) 33.6,8.137 41.6,8.137 ccw(c41.6,8.188) 41.65,8.188 ccw(c41.6,8.188) 41.65,8.188 41.65,11.163 cw(c43.425,11.163) 45.2,11.163 ccw(c45.25,11.163) 45.3,11.163 45.3,13.988 ccw(c45.25,13.988) 45.25,14.038 0.25,14.038 ccw(c0.25,13.988) 0.2,13.988 0.2,4.738 ccw(c0.25,4.738)
Keep-Out Layer:
  rectangle: 0,56 3,69
  rectangle: 33.6,4.738 41.6,8.188

## Other copper
SIG1:
  text "L1" at 2.5,66.5 h2 r90
GND1:
  pour cut-out: 45.1,-0.112 45.1,5.963 79.85,5.963 79.85,-0.362
  text "L2" at 2.5,64.5 h2 r90
PWR1:
  text "L3" at 2.5,62.5 h2 r90
SIG2:
  text "L4" at 2.5,60.5 h2 r90
GND2:
  pour cut-out: 45.1,-0.112 45.1,5.963 79.85,5.963 79.85,-0.362
  text "L5" at 2.5,58.5 h2 r90
SIG3:
  text "L6" at 2.5,56.5 h2 r90

## Silkscreen, mask and mechanical layers (free items; w line width, h text height)
Top Mask:
  rectangle: 33.6,4.738 41.6,8.188
  rectangle: 45.2,0.138 79.6,5.988
Bottom Mask:
  rectangle: 33.6,4.738 41.6,8.188
  rectangle: 45.2,0.138 79.6,5.988
DIMENSION-1:
  drawing of 399 lines, arcs and shapes, not listed
  text "Layer" at 3.444,215.254 h3
  text "Name" at 23.448,215.254 h3
  text "Material" at 69.443,215.254 h3
  text "Thickness" at 111.94,215.254 h3
  text "Constant" at 143.939,215.254 h3
  text "Board Layer Stack" at 171.94,215.254 h3
  text "Top Overlay" at 23.448,209.254 h3
  text "Top Mask" at 23.448,203.254 h3
  text "Solder Resist" at 69.443,203.254 h3
  text "0.015mm" at 111.94,203.254 h3
  text "3.8" at 143.939,203.254 h3
  text "1" at 3.444,197.254 h3
  text "SIG1" at 23.448,197.254 h3
  text "0.035mm" at 111.94,197.254 h3
  text "Dielectric 1" at 23.448,191.254 h3
  text "2116" at 69.443,191.254 h3
  text "0.130mm" at 111.94,191.254 h3
  text "4.45" at 143.939,191.254 h3
  text "2" at 3.444,185.254 h3
  text "GND1" at 23.448,185.254 h3
  text "0.035mm" at 111.94,185.254 h3
  text "Core 1" at 23.448,179.254 h3
  text "FR4 Tg150" at 69.443,179.254 h3
  text "0.440mm" at 111.94,179.254 h3
  text "4.6" at 143.939,179.254 h3
  text "3" at 3.444,173.254 h3
  text "PWR1" at 23.448,173.254 h3
  text "0.035mm" at 111.94,173.254 h3
  text "Dielectric 2" at 23.448,167.254 h3
  text "7628" at 69.443,167.254 h3
  text "0.196mm" at 111.94,167.254 h3
  text "4.5" at 143.939,167.254 h3
  text "4" at 3.444,161.254 h3
  text "SIG2" at 23.448,161.254 h3
  text "0.035mm" at 111.94,161.254 h3
  text "Core 2" at 23.448,155.254 h3
  text "FR4 Tg150" at 69.443,155.254 h3
  text "0.440mm" at 111.94,155.254 h3
  text "4.6" at 143.939,155.254 h3
  text "5" at 3.444,149.254 h3
  text "GND2" at 23.448,149.254 h3
  text "0.035mm" at 111.94,149.254 h3
  text "Dielectric 3" at 23.448,143.254 h3
  text "2116" at 69.443,143.254 h3
  text "0.130mm" at 111.94,143.254 h3
  text "4.45" at 143.939,143.254 h3
  text "6" at 3.444,137.254 h3
  text "SIG3" at 23.448,137.254 h3
  text "0.035mm" at 111.94,137.254 h3
  text "Bottom Mask" at 23.448,131.254 h3
  text "Solder Resist" at 69.443,131.254 h3
  text "0.015mm" at 111.94,131.254 h3
  text "3.8" at 143.939,131.254 h3
  text "Bottom Overlay" at 23.448,125.254 h3
  text "Total board thickness:" at 3.444,119.254 h3
  text "1.576mm" at 111.94,119.254 h3
OUTLINE (Mech22):
  the board outline again, w0.1

## Dimensions
0,68.9 to 58.728,0 on DIMENSION-1